# EAGLE board TinyCube12abc_Lib (EAGLE 7.5.0)
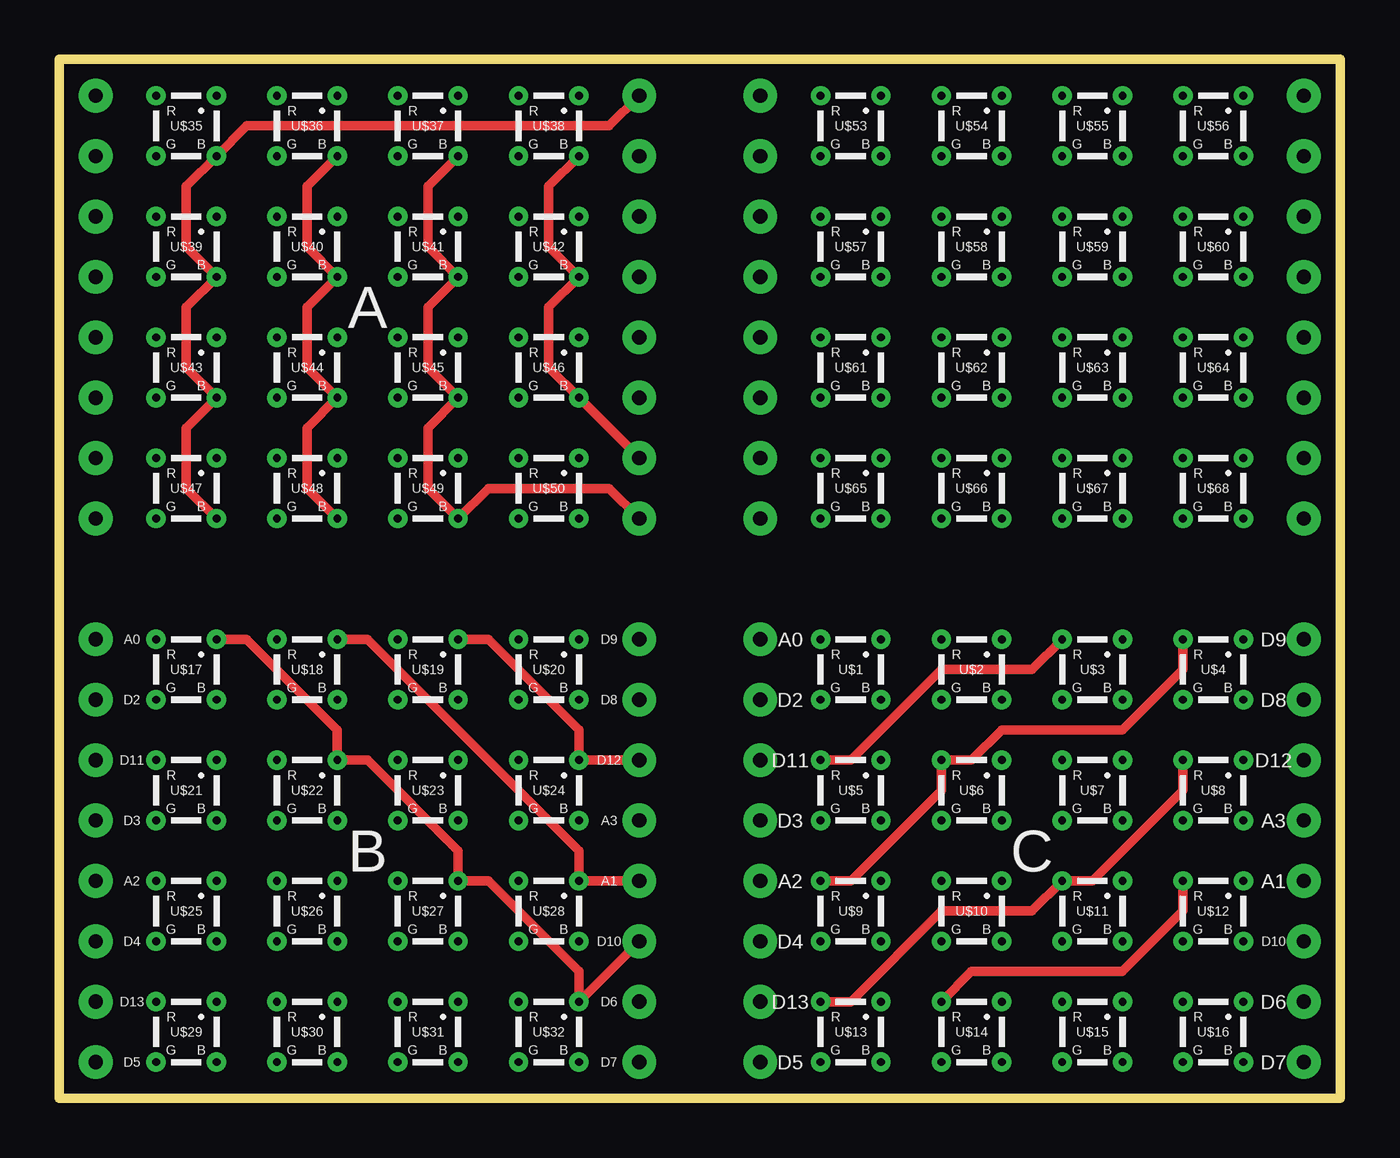
[diagram p0: board, top side]
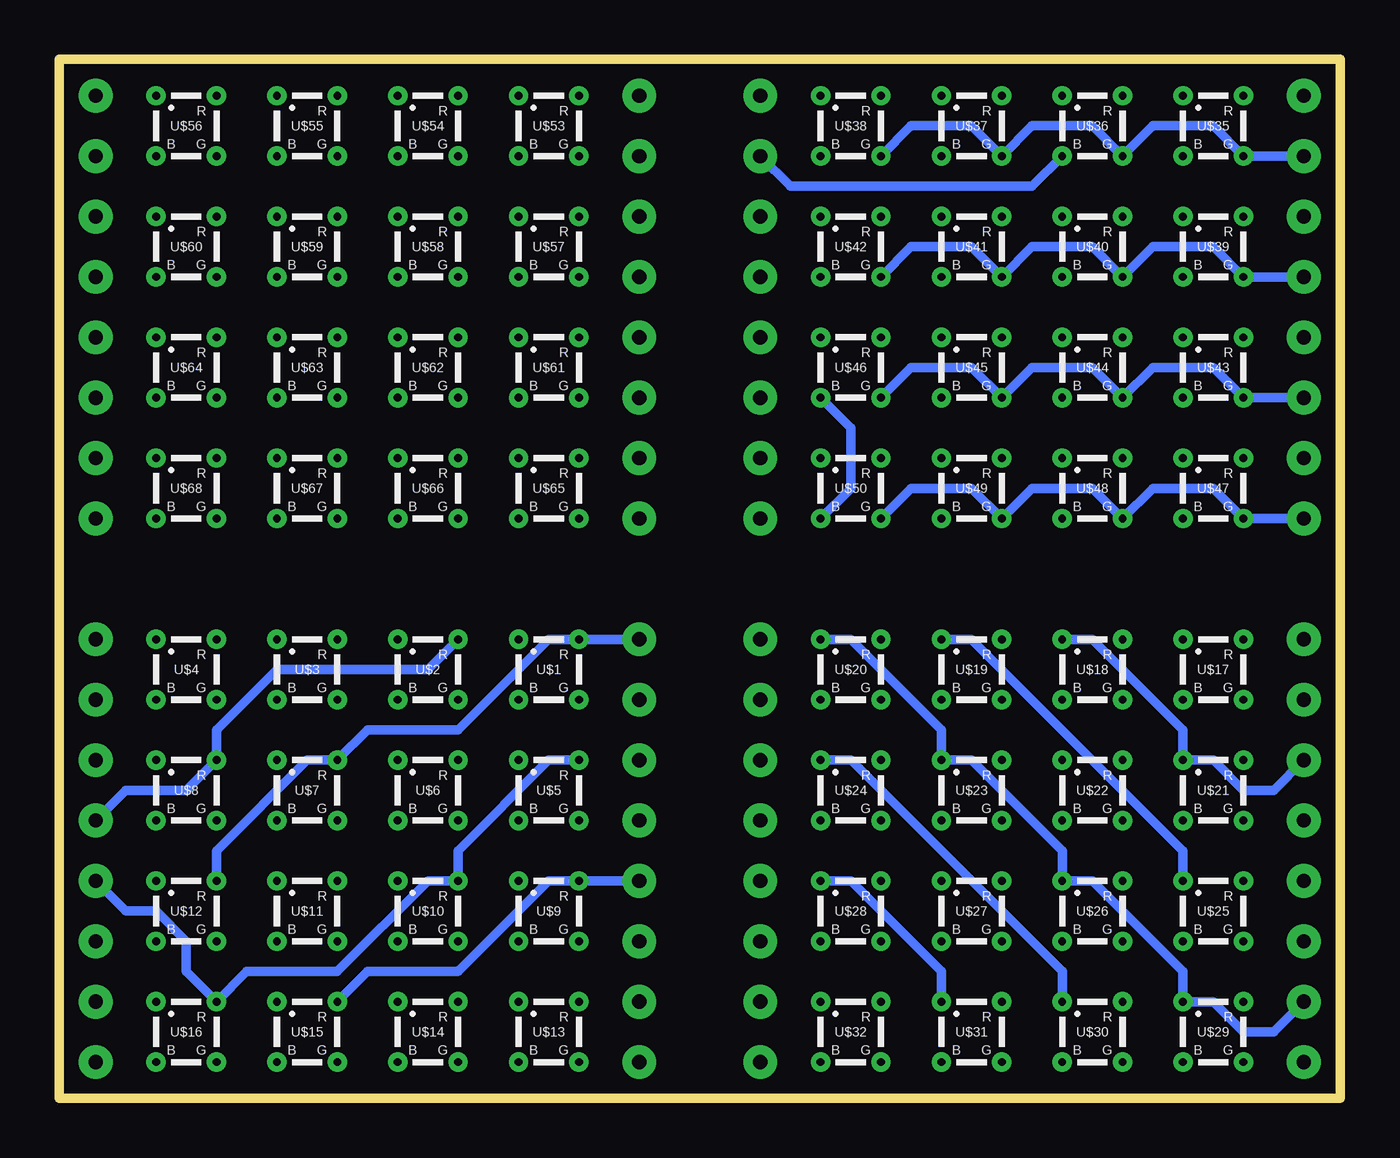
[diagram p1: board, bottom side, seen from below]

Size 53.85 x 43.69 mm. Coordinates in mm from the lower left corner, seen from the top.
Outline: 25.4,0 25.4,0
Outline: 53.85,43.69 53.85,0 0,0 0,43.69 53.85,43.69
Copper layers (1*16): Top 0.0356mm / dielectric 1.5011mm / Bottom 0.0356mm
Design rules "LaenPCBOrder": minimum track width 6mil, minimum drill 13mil, track to track 6mil, track to pad 6mil, pad to pad 6mil, via to via 6mil, smd to smd 6mil, copper to edge 15mil, drill to drill 6mil, minimum pad ring 7mil, minimum via ring 7mil, stop-mask expansion 3mil, vias tented up to drill 0mil, thermal gap 10mil

## Footprints (pad centres in the part's own frame; a part is rotated, then mirrored left to right if it is on the bottom)
TINY_HEADER_PKG = drill 0.6 pad 1.422: P$1 0,0; P$2 0,-2.54; P$3 0,-5.08; P$4 0,-7.62; P$5 0,-10.16; P$6 0,-12.7; P$7 0,-15.24; P$8 0,-17.78
10MIL = drill 0.33 pad 0.813: + 1.27,1.27; B 1.27,-1.27; G -1.27,-1.27; R -1.27,1.27

## Placement (x,y rotation side)
JP1  TINY_HEADER_DEV  [TINY_HEADER_PKG]  29.46,19.3 0 top
JP2  TINY_HEADER_DEV  [TINY_HEADER_PKG]  52.32,19.3 0 top
JP3  TINY_HEADER_DEV  [TINY_HEADER_PKG]  29.46,42.16 0 top
JP4  TINY_HEADER_DEV  [TINY_HEADER_PKG]  52.32,42.16 0 top
U$1  PILLAR  [10MIL]  33.27,18.03 0 top
U$2  PILLAR  [10MIL]  38.35,18.03 0 top
U$3  PILLAR  [10MIL]  43.43,18.03 0 top
U$4  PILLAR  [10MIL]  48.51,18.03 0 top
U$5  PILLAR  [10MIL]  33.27,12.95 0 top
U$6  PILLAR  [10MIL]  38.35,12.95 0 top
U$7  PILLAR  [10MIL]  43.43,12.95 0 top
U$8  PILLAR  [10MIL]  48.51,12.95 0 top
U$9  PILLAR  [10MIL]  33.27,7.87 0 top
U$10  PILLAR  [10MIL]  38.35,7.87 0 top
U$11  PILLAR  [10MIL]  43.43,7.87 0 top
U$12  PILLAR  [10MIL]  48.51,7.87 0 top
U$13  PILLAR  [10MIL]  33.27,2.79 0 top
U$14  PILLAR  [10MIL]  38.35,2.79 0 top
U$15  PILLAR  [10MIL]  43.43,2.79 0 top
U$16  PILLAR  [10MIL]  48.51,2.79 0 top
U$17  PILLAR  [10MIL]  5.33,18.03 0 top
U$18  PILLAR  [10MIL]  10.41,18.03 0 top
U$19  PILLAR  [10MIL]  15.49,18.03 0 top
U$20  PILLAR  [10MIL]  20.57,18.03 0 top
U$21  PILLAR  [10MIL]  5.33,12.95 0 top
U$22  PILLAR  [10MIL]  10.41,12.95 0 top
U$23  PILLAR  [10MIL]  15.49,12.95 0 top
U$24  PILLAR  [10MIL]  20.57,12.95 0 top
U$25  PILLAR  [10MIL]  5.33,7.87 0 top
U$26  PILLAR  [10MIL]  10.41,7.87 0 top
U$27  PILLAR  [10MIL]  15.49,7.87 0 top
U$28  PILLAR  [10MIL]  20.57,7.87 0 top
U$29  PILLAR  [10MIL]  5.33,2.79 0 top
U$30  PILLAR  [10MIL]  10.41,2.79 0 top
U$31  PILLAR  [10MIL]  15.49,2.79 0 top
U$32  PILLAR  [10MIL]  20.57,2.79 0 top
U$33  TINY_HEADER_DEV  [TINY_HEADER_PKG]  1.52,19.3 0 top
U$34  TINY_HEADER_DEV  [TINY_HEADER_PKG]  24.38,19.3 0 top
U$35  PILLAR  [10MIL]  5.33,40.89 0 top
U$36  PILLAR  [10MIL]  10.41,40.89 0 top
U$37  PILLAR  [10MIL]  15.49,40.89 0 top
U$38  PILLAR  [10MIL]  20.57,40.89 0 top
U$39  PILLAR  [10MIL]  5.33,35.81 0 top
U$40  PILLAR  [10MIL]  10.41,35.81 0 top
U$41  PILLAR  [10MIL]  15.49,35.81 0 top
U$42  PILLAR  [10MIL]  20.57,35.81 0 top
U$43  PILLAR  [10MIL]  5.33,30.73 0 top
U$44  PILLAR  [10MIL]  10.41,30.73 0 top
U$45  PILLAR  [10MIL]  15.49,30.73 0 top
U$46  PILLAR  [10MIL]  20.57,30.73 0 top
U$47  PILLAR  [10MIL]  5.33,25.65 0 top
U$48  PILLAR  [10MIL]  10.41,25.65 0 top
U$49  PILLAR  [10MIL]  15.49,25.65 0 top
U$50  PILLAR  [10MIL]  20.57,25.65 0 top
U$51  TINY_HEADER_DEV  [TINY_HEADER_PKG]  1.52,42.16 0 top
U$52  TINY_HEADER_DEV  [TINY_HEADER_PKG]  24.38,42.16 0 top
U$53  PILLAR  [10MIL]  33.27,40.89 0 top
U$54  PILLAR  [10MIL]  38.35,40.89 0 top
U$55  PILLAR  [10MIL]  43.43,40.89 0 top
U$56  PILLAR  [10MIL]  48.51,40.89 0 top
U$57  PILLAR  [10MIL]  33.27,35.81 0 top
U$58  PILLAR  [10MIL]  38.35,35.81 0 top
U$59  PILLAR  [10MIL]  43.43,35.81 0 top
U$60  PILLAR  [10MIL]  48.51,35.81 0 top
U$61  PILLAR  [10MIL]  33.27,30.73 0 top
U$62  PILLAR  [10MIL]  38.35,30.73 0 top
U$63  PILLAR  [10MIL]  43.43,30.73 0 top
U$64  PILLAR  [10MIL]  48.51,30.73 0 top
U$65  PILLAR  [10MIL]  33.27,25.65 0 top
U$66  PILLAR  [10MIL]  38.35,25.65 0 top
U$67  PILLAR  [10MIL]  43.43,25.65 0 top
U$68  PILLAR  [10MIL]  48.51,25.65 0 top

## Library data of the parts
JP1-JP4 U$33 U$34 U$51 U$52 = TinyHeader
U$1-U$32 U$35-U$50 U$53-U$68 = PILLAR

## Nets
N$1: JP1.P$1 U$1.R U$7.R U$12.R U$14.R
N$2: JP2.P$4 U$2.R U$8.R U$11.R U$13.R
N$3: JP2.P$5 U$3.R U$5.R U$10.R U$16.R
N$4: U$20.+ U$23.+ U$26.+ U$29.+ U$33.P$7
N$5: JP1.P$5 U$4.R U$6.R U$9.R U$15.R
N$6: U$18.+ U$21.+ U$28.+ U$31.+ U$33.P$3 U$34.P$5
N$8: U$17.+ U$22.+ U$27.+ U$32.+ U$34.P$6
N$9: U$35.G U$36.G U$37.G U$38.G U$51.P$2
N$10: U$39.G U$40.G U$41.G U$42.G U$51.P$4
N$11: U$43.G U$44.G U$45.G U$46.G U$51.P$6
N$12: U$47.G U$48.G U$49.G U$50.G U$51.P$8
N$13: U$35.B U$39.B U$43.B U$47.B U$52.P$1
N$14: U$19.+ U$24.+ U$25.+ U$30.+ U$34.P$3
N$15: U$37.B U$41.B U$45.B U$49.B U$52.P$8
N$16: U$38.B U$42.B U$46.B U$50.B U$52.P$7
N$17: U$36.B U$40.B U$44.B U$48.B U$52.P$2

## Tracks (layer width: path | path; a pad name or v marks a point on that pad's centre or on a via)
N$1
  Top 0.406: U$14.R 38.35,5.33 44.7,5.33 47.24,7.87 U$12.R
  Bottom 0.406: JP1.P$1 U$1.R 33.27,19.3 37.08,15.49 40.89,15.49 U$7.R 43.43,14.22 47.24,10.41 U$12.R
N$2
  Top 0.406: U$8.R 47.24,12.95 43.43,9.14 U$11.R 40.89,7.87 37.08,7.87 33.27,4.06 U$13.R
  Bottom 0.406: U$2.R 38.35,18.03 44.7,18.03 47.24,15.49 U$8.R 48.51,12.95 51.05,12.95 JP2.P$4
N$3
  Top 0.406: U$5.R 33.27,14.22 37.08,18.03 40.89,18.03 U$3.R
  Bottom 0.406: U$5.R 33.27,14.22 37.08,10.41 U$10.R 38.35,9.14 42.16,5.33 45.97,5.33 U$16.R 48.51,5.33 48.51,6.6 49.78,7.87 51.05,7.87 JP2.P$5
N$4
  Bottom 0.406: U$20.+ 20.57,19.3 16.76,15.49 U$23.+ 15.49,14.22 11.68,10.41 U$26.+ 10.41,9.14 6.6,5.33 U$29.+ 5.33,4.06 4.06,2.79 2.79,2.79 U$33.P$7
N$5
  Top 0.406: U$9.R 33.27,9.14 37.08,12.95 U$6.R 38.35,14.22 39.62,15.49 44.7,15.49 47.24,18.03 U$4.R
  Bottom 0.406: U$15.R 40.89,5.33 37.08,5.33 33.27,9.14 U$9.R JP1.P$5
N$6
  Top 0.406: U$18.+ 12.95,19.3 21.84,10.41 U$28.+ U$34.P$5
  Bottom 0.406: U$31.+ 16.76,5.33 20.57,9.14 U$28.+ | U$18.+ 10.41,19.3 6.6,15.49 U$21.+ 5.33,14.22 4.06,12.95 2.79,12.95 U$33.P$3
N$8
  Top 0.406: U$17.+ 7.87,19.3 11.68,15.49 U$22.+ 12.95,14.22 16.76,10.41 U$27.+ 18.03,9.14 21.84,5.33 U$32.+ U$34.P$6
N$9
  Bottom 0.406: U$51.P$2 U$35.G 5.33,40.89 7.87,40.89 U$36.G 10.41,40.89 12.95,40.89 U$37.G 15.49,40.89 18.03,40.89 U$38.G
N$10
  Bottom 0.406: U$51.P$4 U$39.G 5.33,35.81 7.87,35.81 U$40.G 10.41,35.81 12.95,35.81 U$41.G 15.49,35.81 18.03,35.81 U$42.G
N$11
  Bottom 0.406: U$51.P$6 U$43.G 5.33,30.73 7.87,30.73 U$44.G 10.41,30.73 12.95,30.73 U$45.G 15.49,30.73 18.03,30.73 U$46.G
N$12
  Bottom 0.406: U$51.P$8 U$47.G 5.33,25.65 7.87,25.65 U$48.G 10.41,25.65 12.95,25.65 U$49.G 15.49,25.65 18.03,25.65 U$50.G
N$13
  Top 0.406: U$52.P$1 23.11,40.89 7.87,40.89 U$35.B 5.33,38.35 5.33,35.81 U$39.B 5.33,33.27 5.33,30.73 U$43.B 5.33,28.19 5.33,25.65 U$47.B
N$14
  Top 0.406: U$19.+ 18.03,19.3 21.84,15.49 U$24.+ U$34.P$3
  Bottom 0.406: U$30.+ 11.68,5.33 20.57,14.22 U$24.+ | U$25.+ 6.6,10.41 15.49,19.3 U$19.+
N$15
  Top 0.406: U$37.B 15.49,38.35 15.49,35.81 U$41.B 15.49,33.27 15.49,30.73 U$45.B 15.49,28.19 15.49,25.65 U$49.B 18.03,25.65 23.11,25.65 U$52.P$8
N$16
  Top 0.406: U$38.B 20.57,38.35 20.57,35.81 U$42.B 20.57,33.27 20.57,30.73 U$46.B U$52.P$7
  Bottom 0.406: U$46.B 20.57,28.19 20.57,25.65 U$50.B
N$17
  Top 0.406: U$36.B 10.41,38.35 10.41,35.81 U$40.B 10.41,33.27 10.41,30.73 U$44.B 10.41,28.19 10.41,25.65 U$48.B
  Bottom 0.406: U$52.P$2 23.11,38.35 12.95,38.35 U$36.B

## Text on the board
tPlace: A
tNames: A0 | D9 | A0 | D9 | D2 | D8 | D2 | D8 | D11 | D12 | D11 | D12 | D3 | A3 | D3 | A3 | B | C | A2 | A1 | A2 | A1 | D4 | D10 | D4 | D10 | D13 | D6 | D13 | D6 | D5 | D7 | D5 | D7